# EAGLE board SCFschem (EAGLE 8.7.1)
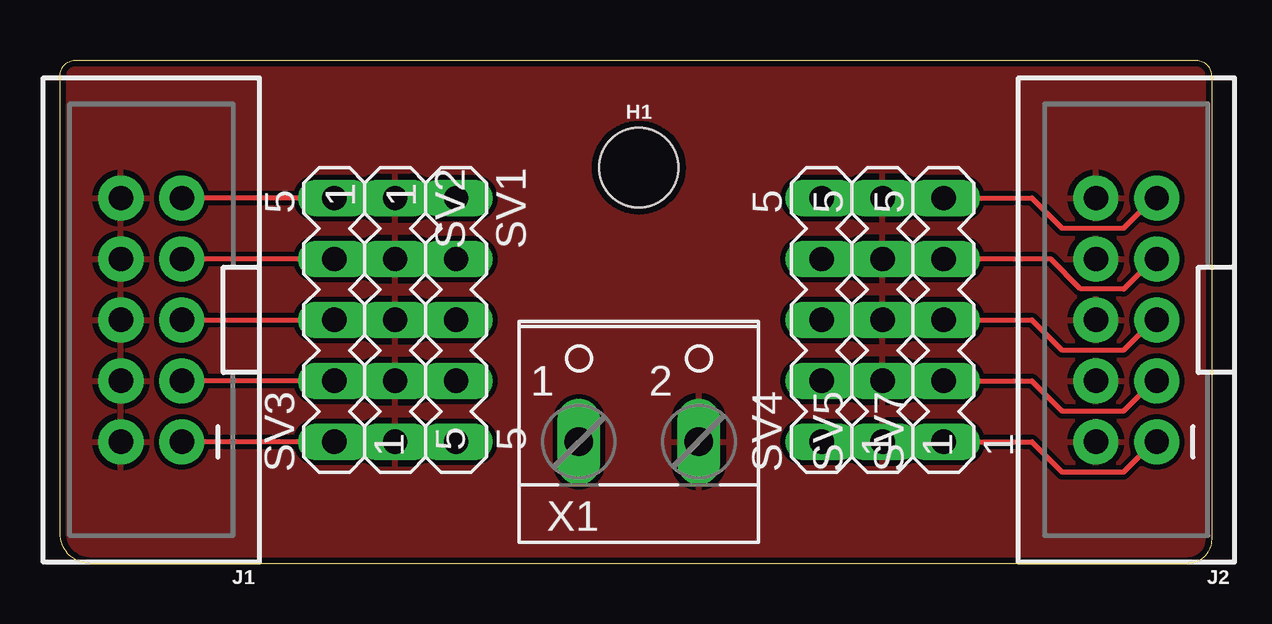
[diagram p0: board, top side]
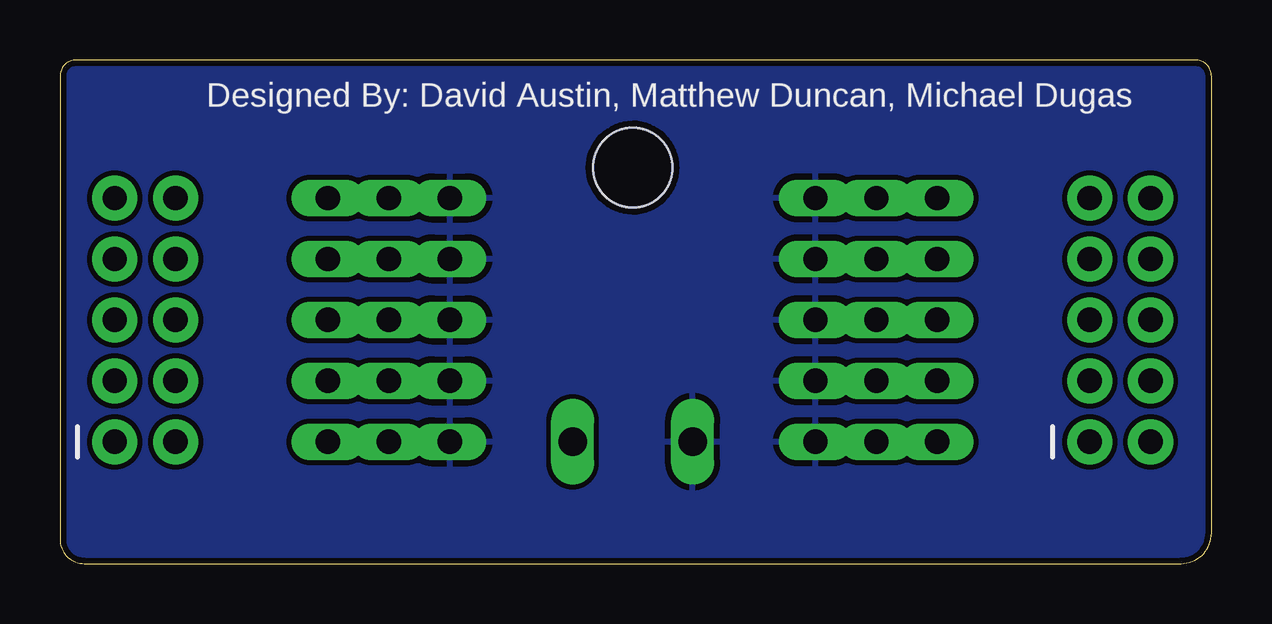
[diagram p1: board, bottom side, seen from below]

Size 48 x 21 mm. Coordinates in mm from the lower left corner, seen from the top.
Outline: 0.68,21 47.32,21 arc-90 48,20.32 48,1.01 arc-90 46.99,0 1.27,0 arc-90 0,1.27 0,20.32 arc-90 0.68,21
Copper layers (1*16): Top 0.035mm / dielectric 1.5mm / Bottom 0.035mm
Design rules "Dirty8TS *": minimum track width 8mil, minimum drill 15mil, track to track 8mil, track to pad 8mil, pad to pad 8mil, via to via 8mil, smd to smd 0mil, copper to edge 10mil, drill to drill 10mil, minimum pad ring 10mil, minimum via ring 6mil, stop-mask expansion 2mil, vias tented up to drill 25mil, thermal gap 10mil

## Footprints (pad centres in the part's own frame; a part is rotated, then mirrored left to right if it is on the bottom)
STAND-OFF = hole 3.302: 0,0
2X5-SHROUDED = drill 1.016 pad 1.88: 1 -1.27,5.08; 2 1.27,5.08; 3 -1.27,2.54; 4 1.27,2.54; 5 -1.27,0; 6 1.27,0; 7 -1.27,-2.54; 8 1.27,-2.54; 9 -1.27,-5.08; 10 1.27,-5.08
MA05-1 = drill 1.016 long: 1 -5.08,0; 2 -2.54,0; 3 0,0; 4 2.54,0; 5 5.08,0
W237-102 = drill 1.194 long: 1 -2.5,-1.27; 2 2.5,-1.27

## Placement (x,y rotation side)
H1  STAND-OFF  [STAND-OFF]  24.13,16.51 0 top
J1  AVR_SPI_PROG_5X2_NEWPTH2  [2X5-SHROUDED]  3.81,10.16 180 top
J2  AVR_SPI_PROG_5X2_NEWPTH2  [2X5-SHROUDED]  44.45,10.16 180 top
SV1  [MA05-1]  16.51,10.16 270 top
SV2  [MA05-1]  13.97,10.16 270 top
SV3  [MA05-1]  11.43,10.16 90 top
SV4  [MA05-1]  31.75,10.16 90 top
SV5  [MA05-1]  34.29,10.16 90 top
SV7  [MA05-1]  36.83,10.16 90 top
X1  [W237-102]  24.13,6.35 0 top

## Library data of the parts
H1 = SparkFun-Hardware
J1 J2 = SparkFun-Connectors; PROD_ID: CONN-08671; SF_ID: PRT-08506
SV1-SV5 SV7 = con-lstb; OC_FARNELL: unknown; OC_NEWARK: unknown
X1 = ECE388; MPN: 237-102; OC_FARNELL: unknown; OC_NEWARK: 70K9898

## Nets
GND: J1.2 J1.4 J1.6 J1.8 J1.10 J2.2 J2.4 J2.6 J2.8 J2.10 SV2.1 SV2.2 SV2.3 SV2.4 SV2.5 SV5.1 SV5.2 SV5.3 SV5.4 SV5.5 X1.2
S1: J1.1 SV3.1
S2: J1.3 SV3.2
S3: J1.5 SV3.3
S4: J1.7 SV3.4
S5: J1.9 SV3.5
S6: J2.1 SV7.1
S7: J2.3 SV7.2
S8: J2.5 SV7.3
S9: J2.7 SV7.4
S10: J2.9 SV7.5
VCC: SV1.1 SV1.2 SV1.3 SV1.4 SV1.5 SV4.1 SV4.2 SV4.3 SV4.4 SV4.5 X1.1

## Tracks (layer width: path | path; a pad name or v marks a point on that pad's centre or on a via)
GND
  pour Top: 0,21 48,21 48.26,0 0,0
S1
  Top 0.203: SV3.1 J1.1
S2
  Top 0.203: SV3.2 J1.3
S3
  Top 0.203: J1.5 SV3.3
S4
  Top 0.203: SV3.4 J1.7
S5
  Top 0.203: SV3.5 J1.9
S6
  Top 0.203: SV7.1 40.51,5.08 41.78,3.81 44.32,3.81 45.59,5.08 J2.1
S7
  Top 0.203: SV7.2 40.51,7.62 41.78,6.35 44.32,6.35 45.59,7.62 J2.3
S8
  Top 0.203: SV7.3 40.51,10.16 41.78,8.89 44.32,8.89 45.59,10.16 J2.5
S9
  Top 0.203: SV7.4 41.29,12.7 42.54,11.46 44.3,11.46 44.32,11.43 45.59,12.7 J2.7
S10
  Top 0.203: SV7.5 40.51,15.24 41.78,13.97 44.32,13.97 45.59,15.24 J2.9
VCC
  pour Bottom: 0,0 0,21 48,21 48.26,0

## Text on the board
bPlace: Designed By: David Austin, Matthew Duncan, Michael Dugas